# EAGLE board ExternalLEDs (EAGLE 8.3.2)
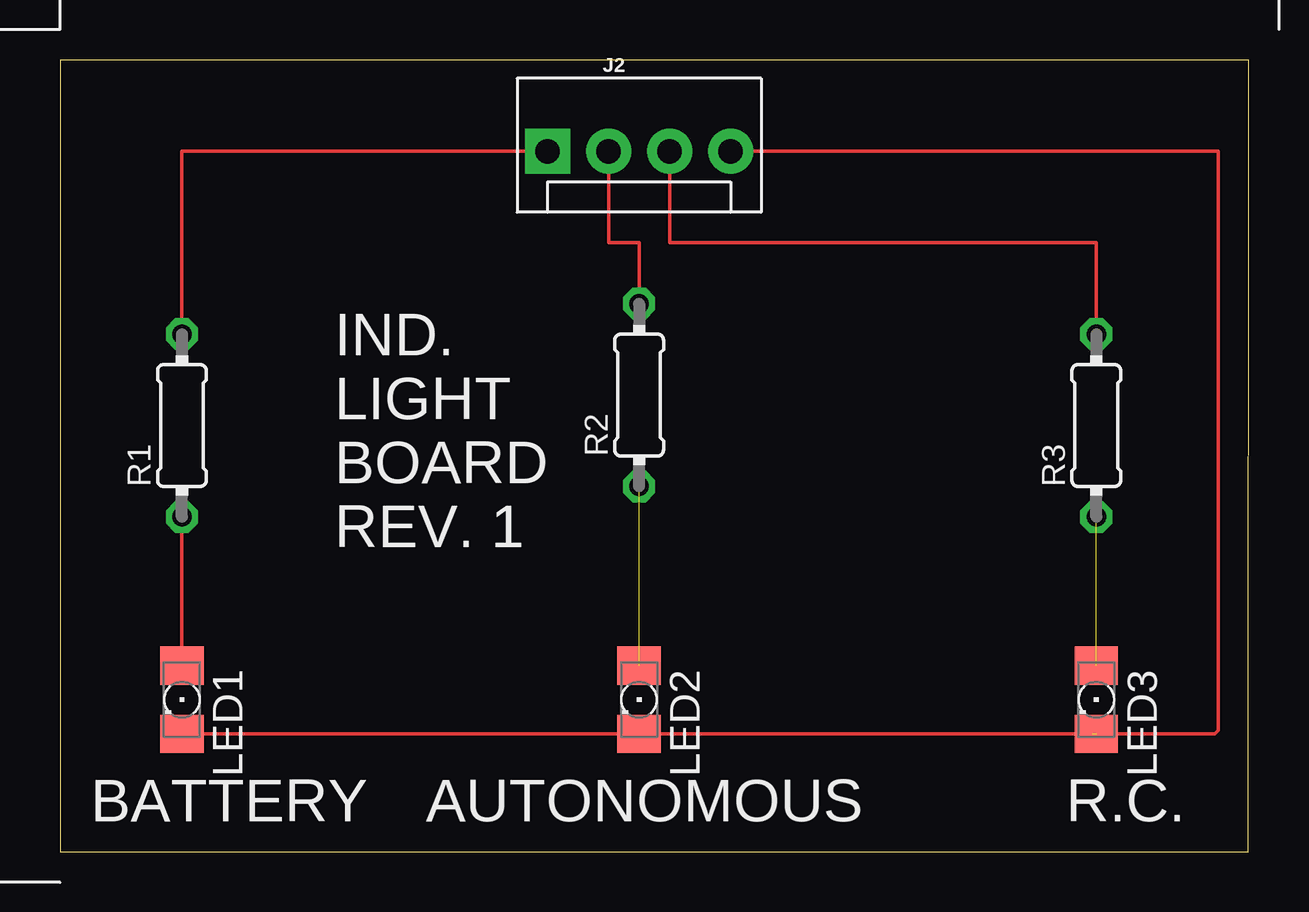
[diagram p0: board, top side]

Size 49.53 x 33.02 mm. Coordinates in mm from the lower left corner, seen from the top.
Outline: 0,0 49.51,0 49.53,33.02 0,33.02 0,0
Copper layers (1*16): Top 0.035mm / dielectric 1.5mm / Bottom 0.035mm
Design rules "default": minimum track width 6mil, minimum drill 0.35mm, track to track 6mil, track to pad 6mil, pad to pad 6mil, via to via 6mil, smd to smd 6mil, copper to edge 40mil, drill to drill 6mil, minimum pad ring 10mil, minimum via ring 8mil, stop-mask expansion 4mil, vias tented up to drill 0mil, thermal gap 10mil

## Footprints (pad centres in the part's own frame; a part is rotated, then mirrored left to right if it is on the bottom)
MOLEX-1X4 = drill 1.016 pad 1.88 square: 1 0,0 | drill 1.016 pad 1.88: 2 2.54,0; 3 5.08,0; 4 7.62,0
LED_1206 = smd 1.6 x 1.803: A -1.422,0; C 1.422,0
0204/7 = drill 0.813 octagon: 1 -3.81,0; 2 3.81,0

## Placement (x,y rotation side)
J2  [MOLEX-1X4]  20.32,29.21 0 top
LED1  [LED_1206]  5.08,6.35 270 top
LED2  [LED_1206]  24.13,6.35 270 top
LED3  [LED_1206]  43.18,6.35 270 top
R1  [0204/7]  5.08,17.78 90 top
R2  [0204/7]  24.13,19.05 90 top
R3  [0204/7]  43.18,17.78 90 top

## Library data of the parts
J2 = SparkFun-Connectors; PROD_ID: CONN-08186; SF_ID: PRT-08231
LED1-LED3 = eagle-ltspice; SPICEMODEL: NONE; SPICEPREFIX: D; SPICETYPE: diode
R1-R3 = rcl

## Nets
N$1: J2.1 R1.2
N$2: J2.2 R2.2
N$3: J2.3 R3.2
N$4: LED1.A R1.1
N$5: LED2.A R2.1
N$6: LED3.A R3.1
N$7: J2.4 LED1.C LED2.C LED3.C

## Tracks (layer width: path | path; a pad name or v marks a point on that pad's centre or on a via)
N$1
  Top 0.152: R1.2 5.08,29.21 J2.1
N$2
  Top 0.152: R2.2 24.13,25.4 22.86,25.4 J2.2
N$3
  Top 0.152: R3.2 43.18,25.4 25.4,25.4 J2.3
N$4
  Top 0.152: R1.1 LED1.A
N$5  (1 unrouted)
N$6  (1 unrouted)
N$7  (1 unrouted)
  Top 0.152: 5.08,5.03 LED1.C LED2.C 43.03,4.93 43.18,5.08 | LED3.C 48.11,4.93 48.26,5.08 48.26,29.21 J2.4

## Text on the board
tPlace: IND. / LIGHT / BOARD / REV. 1 | BATTERY | AUTONOMOUS | R.C.